# Altium PCB 4501-WB_AV_BMS_REV_A1.PcbDoc (part 2 of 2)
Units mil, origin at the board's own origin, x right, y up, seen from the top; angles counter-clockwise.
Board outline 3758.45 x 2809.6 mil, 2 copper layers (Top Layer, Bottom Layer), stack 65.792 mil thick; 104 components, 87 nets, 330 pads, 249 vias.
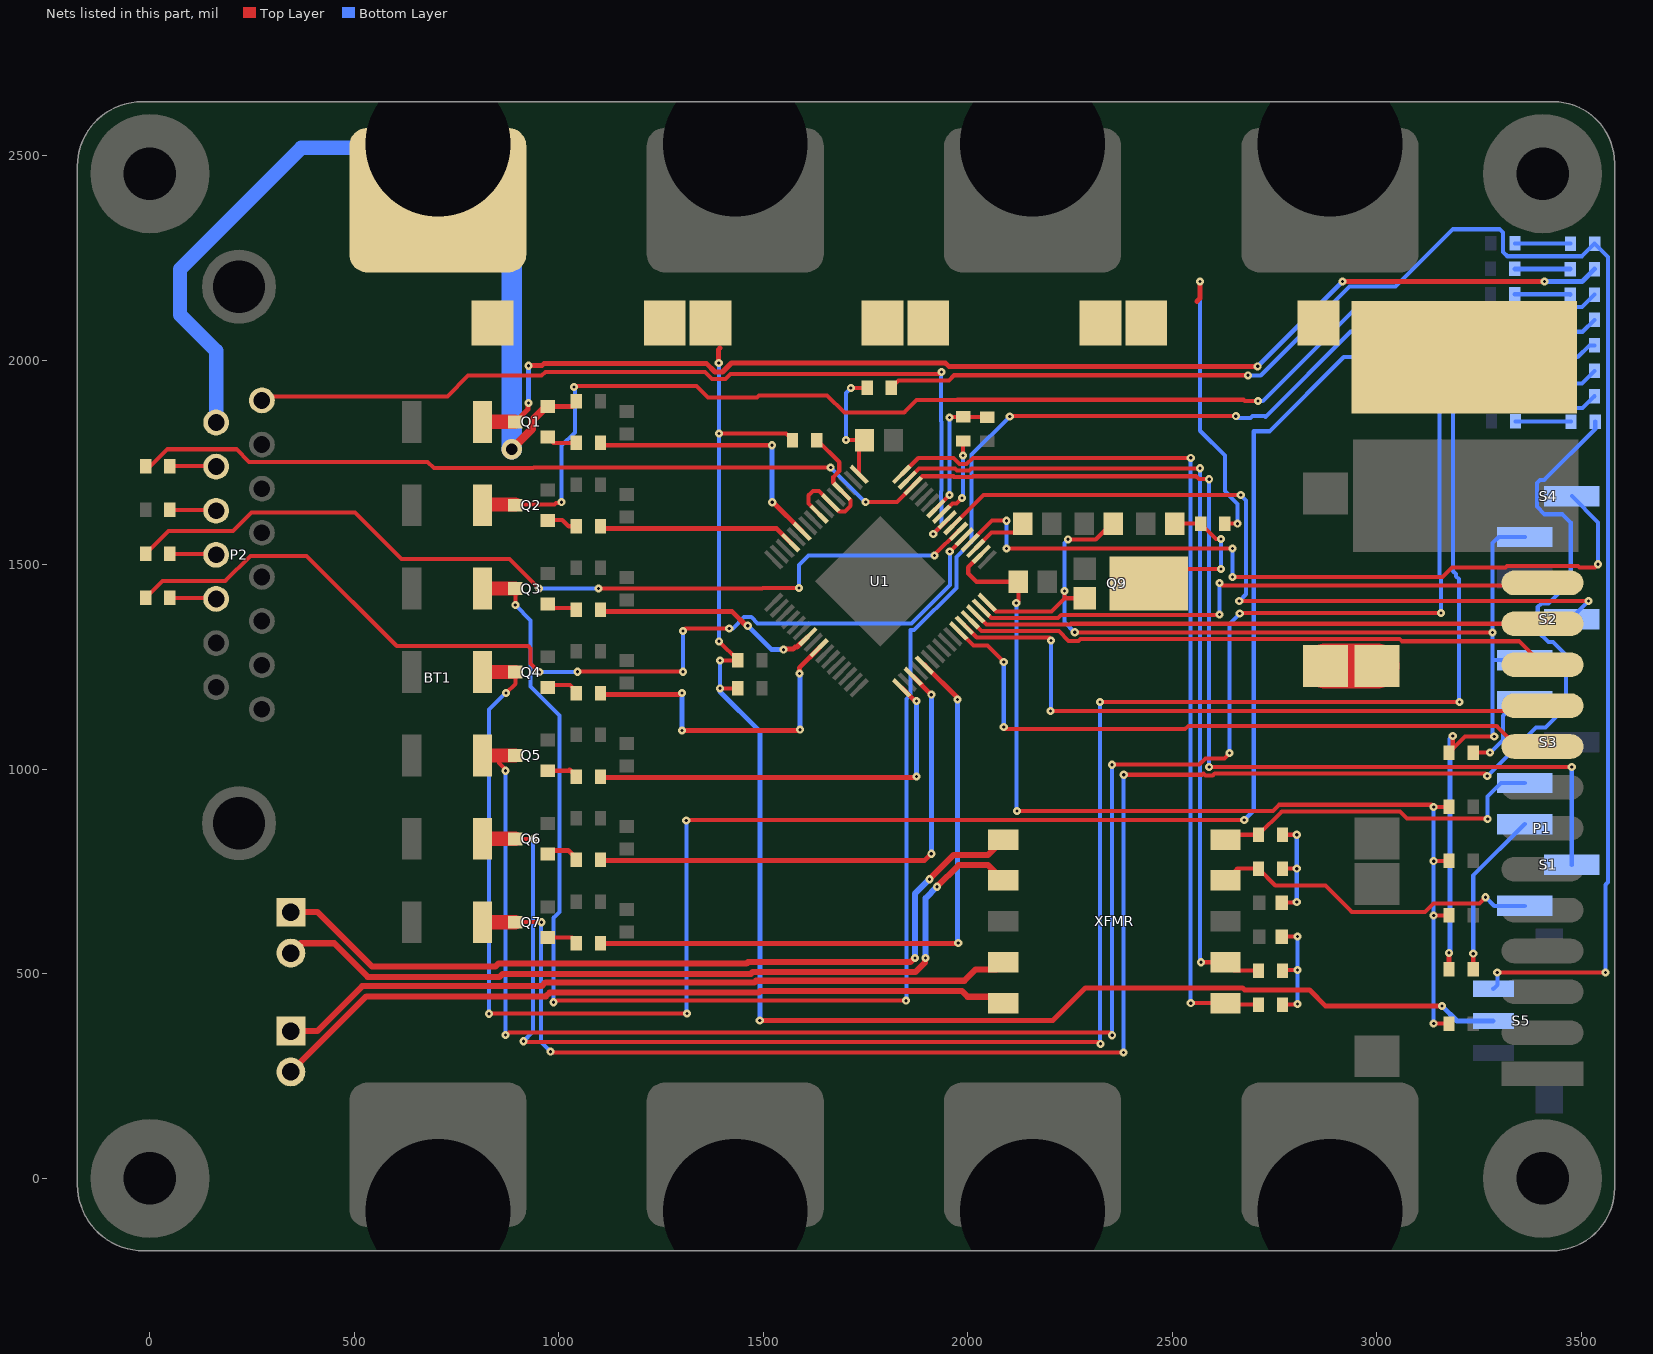
[diagram p2: the nets of this part, all layers, seen from the top]

## Via types
v1: diameter 19.87, hole 7.87, Top Layer to Bottom Layer, tented both sides, 230 vias
v2: diameter 50, hole 28, Top Layer to Bottom Layer, tented both sides, 10 vias
v3: diameter 19.87, hole 7.87, Top Layer to Bottom Layer, 9 vias

## Nets (pads, with @x,y where several pads share a name; then routed paths per layer and width w, separated by ;. In a path a pad name is that pad's centre, name@x,y a point inside that pad or via, vN(x,y) a via of type N, cw(c..) or ccw(c..) an arc to the next point about the centre after c; other vN are vias at no path point) (continued)
GPIO5: P1.9 U1.43 | length 1644.2
  Top Layer w10: U1.43@1977.49,1338.54 2013.5,1302.53 2047.7,1302.53 v1(2087.9,1262.33) ; v1(2087.9,1103.43) 2092.84,1098.5 2531.37,1098.5 2539.25,1106.37 3293.16,1106.37 3343.63,1055.91 P1.9@3405.05,1055.91
  Bottom Layer w10: v1(2087.9,1103.43) v1(2087.9,1262.33)
GPIO6: P1.10 U1.44 | length 1603.4
  Top Layer w10: U1.44@1991.41,1352.46 2021.77,1322.1 2199.82,1322.1 2203.5,1318.42 v1(2203.5,1314.93) ; v1(2202.23,1142.51) P1.10@3402.95,1142.51
  Bottom Layer w10: v1(2202.23,1142.51) 2203.5,1143.78 v1(2203.5,1314.93)
GPIO7: P1.11 U1.45 | length 1449.6
  Top Layer w10: U1.45@2005.33,1366.38 2033.61,1338.1 2222.45,1338.1 2246.35,1314.2 2270.07,1314.2 2275.01,1319.13 3055.86,1319.13 3061.66,1313.33 3347.63,1313.33 P1.11@3405.05,1255.91
GPIO8: P1.12 U1.46 | length 1397.5
  Top Layer w10: U1.46@2019.25,1380.3 2045.45,1354.1 2250.75,1354.1 2252.73,1356.07 3404.89,1356.07 P1.12@3405.05,1355.91
GPIO9: P1.13 U1.47 | length 1468.2
  Top Layer w10: U1.47@2033.17,1394.22 2057.29,1370.1 2220.91,1370.1 2228.31,1377.49 2614.12,1377.49 v1(2615.43,1378.81) ; v1(2615.43,1455.91) 2622.24,1449.1 3398.25,1449.1 P1.13@3405.05,1455.91
  Bottom Layer w10: v1(2615.43,1378.81) v1(2615.43,1455.91)
IA_N: P4.1 XFMR.4 | length 1812.1
  Top Layer w15: P4.1@344.63,360.13 409.28,360.13 519.08,469.93 957.87,469.93 966.94,479 1477.93,479 1482.06,483.13 1991.55,483.13 2019.26,510.83 2069.6,510.83 XFMR.4@2087.1,528.33
IA_P: P4.2 XFMR.5 | length 1836.8
  Top Layer w15: P4.2@344.63,260.13 529.43,444.93 968.23,444.93 977.29,454 1488.28,454 1492.41,458.13 1984.96,458.13 1999.19,443.9 2071.54,443.9 XFMR.5@2087.1,428.33
IB_N: P3.2 XFMR.2 | length 2006.5
  Top Layer w15: P3.2@344.63,550.83 368.56,574.76 450.72,574.76 532.8,492.68 855.28,492.68 862.6,500 1469.23,500 1473.36,504.13 1871.58,504.13 1895.63,528.18 1895.63,537.66 v1(1896.5,538.53) ; v1(1924.4,713.03) 1977.2,765.83 2049.6,765.83 XFMR.2@2087.1,728.33
  Bottom Layer w15: v1(1896.5,538.53) 1896.5,685.13 v1(1924.4,713.03)
IB_P: P3.1 XFMR.1 | length 2018.5
  Top Layer w15: P3.1@344.63,650.83 410,650.83 543.16,517.68 844.92,517.68 852.24,525 1458.87,525 1463,529.13 1859.9,529.13 1869.31,538.53 v1(1870.63,538.53) ; v1(1906.1,731.33) 1965.61,790.83 2049.6,790.83 XFMR.1@2087.1,828.33
  Bottom Layer w15: v1(1870.63,538.53) 1870.63,695.85 v1(1906.1,731.33)
NetC9_2: C9.2 R22.1 U1.1 | length 306.7
  Top Layer w10: v1(1701.9,1805.23) 1746.57,1805.23 C9.2@1747.47,1804.33 1733.9,1790.77 U1.1@1733.9,1721.32 ; v1(1713.9,1932.23) 1714.6,1932.93 R22.1@1753.77,1932.93
  Bottom Layer w10: v1(1701.9,1805.23) 1701.9,1920.23 v1(1713.9,1932.23)
NetC10_2: C10.2 Q9.3 R25.1 | length 395.2
  Top Layer w10: Q9.3@2442.6,1454.63 2478.1,1490.13 v1(2619.3,1490.13) ; C10.2@2505.65,1600.83 R25.1@2569.3,1600.83 2606.9,1563.23 v1(2619.3,1563.23)
  Bottom Layer w10: v1@2619.3,1488.63 v1(2619.3,1490.13) v1(2619.3,1563.23)
NetC14_2: C14.2 R32.2 R33.1 | length 280.4
  Top Layer w10: R33.1@2767.51,510.01 2768.34,509.18 v1(2806.35,509.18) ; C14.2@2767.51,591.08 v1(2806.35,591.08) ; R32.2@2769.48,425 2805.37,425 v1(2806.35,425.99)
  Bottom Layer w10: v1(2806.35,425.99) v1(2806.35,509.18) v1(2806.35,591.08)
NetC15_2: C15.2 R34.2 R35.1 | length 275.7
  Top Layer w10: C15.2@2769.48,676.09 C15.2@2767.51,674.12 2804.09,674.12 2805.1,675.13 v1(2804.23,676) ; R34.2@2769.51,757.19 v1(2804.23,757.19) ; R35.1@2769.48,840.2 v1(2804.23,840.2)
  Bottom Layer w10: v1(2804.23,676) v1(2804.23,757.19) v1(2804.23,840.2)
NetD2_1: D2.1 Q1.3 R3.1 | length 2961.8
  Top Layer w12: R3.1@813.17,1849.7 R3.1@814.71,1848.16 ; Q1.3@892.11,1849.7 894.08,1849.7 924.31,1879.93 924.31,1894.43 v1(925.82,1895.94) ; v1(925.82,1987.03) 958.39,1987.03 964.12,1992.77 1360.68,1992.77 1381.71,1971.73 1400.22,1971.73 1422.16,1993.67 1944.99,1993.67 1953.22,1985.43 v1(2708.6,1985.43) ; v1(2915.9,2192.73) v1(3409.7,2192.73)
  Top Layer w35: R3.1@813.17,1849.7 Q1.3@892.11,1849.7
  Bottom Layer w12: v1(925.82,1895.94) v1(925.82,1987.03) ; v1(2708.6,1985.43) v1(2915.9,2192.73) ; v1(3409.7,2192.73) 3501.58,2192.73 D2.1@3532.03,2223.18
NetD2_2: D2.2 R40.2 | length 136
  Bottom Layer w12: R40.2@3337.23,2223.88 3472.27,2223.88 D2.2@3472.97,2223.18
NetD3_1: D3.1 Q2.3 R6.1 | length 3141.9
  Top Layer w10: R6.1@813.17,1645.8 R6.1@814.97,1647.61 ; Q2.3@893.58,1647.61 989.6,1647.61 993.46,1651.46 1004.61,1651.46 v3(1006.5,1653.35) ; v1(1037.3,1934.95) 1039.62,1937.27 1336.14,1937.27 1364.32,1909.1 1483.97,1909.1 1489.51,1914.63 1655.5,1914.63 1697.92,1872.22 1844.42,1872.22 1874.94,1902.74 1973.5,1902.74 1974.63,1903.87 2673.85,1903.87 2677.1,1900.62 2709.41,1900.62 v1(2709.5,1900.53)
  Top Layer w35: R6.1@814.97,1647.61 Q2.3@893.58,1647.61
  Bottom Layer w10: v3(1006.5,1653.35) 1006.5,1791.43 1039.1,1824.03 1039.1,1933.15 v1(1037.3,1934.95) ; v1(2709.5,1900.53) 2721.19,1900.53 2951.09,2130.43 3501.44,2130.43 D3.1@3532.03,2161.02
NetD3_2: D3.2 R45.2 | length 136
  Bottom Layer w12: R45.2@3337.23,2161.72 3472.27,2161.72 D3.2@3472.97,2161.02
NetD4_1: D4.1 Q3.3 R9.1 | length 5083.2
  Top Layer w10: v3(893.58,1401.85) Q3.3@893.58,1445.51 ; v1(987,430.56) 989.67,430.56 993.54,434.43 v1(1848.7,434.43) ; v1(2102.6,1863.03) 2103.34,1863.77 2655.06,1863.77 v1(2655.24,1863.6)
  Top Layer w35: R9.1@813.17,1441.9 818.96,1441.9 819.29,1442.23 893.25,1442.23 Q3.3@893.58,1441.9
  Bottom Layer w10: v3(893.58,1401.85) 931,1364.43 931,1202.43 1001.51,1131.92 1001.51,651.65 987,637.13 v1(987,430.56) ; v1(1848.7,434.43) 1849.69,433.45 1849.69,1172.53 1859.66,1182.51 1859.66,1340.4 1868.39,1340.4 1971.9,1443.91 1971.9,1519.09 2009.44,1556.63 2009.44,1769.87 v1(2102.6,1863.03) ; v1(2655.24,1863.6) 2660.14,1858.7 2691.57,1858.7 2696.47,1863.6 2726.31,1863.6 2727.91,1862 2935.95,2070.03 3503.2,2070.03 D4.1@3532.03,2098.86
NetD4_2: D4.2 R46.2 | length 136
  Bottom Layer w10: R46.2@3337.23,2099.56 3472.27,2099.56 D4.2@3472.97,2098.86
NetD5_1: D5.1 R22.2 S5.3 | length 4054.4
  Top Layer w10: R22.2@1812.83,1932.93 1830.63,1950.74 1953.62,1950.74 1966.55,1963.67 2684.86,1963.67 v1(2685.1,1963.43) ; v1(3294.59,503.24) v1(3558.91,503.24)
  Bottom Layer w10: v1(2685.1,1963.43) 2716.21,1963.43 2933.61,2180.83 3046,2180.83 3185.9,2320.73 3299.8,2320.73 3308.3,2312.23 3308.3,2265.33 3318.9,2254.73 3502.13,2254.73 D5.1@3532.73,2285.33 3565.1,2252.96 3565.1,724.07 3558.91,717.88 v1(3558.91,503.24) ; S5.3@3284.79,463.49 3294.59,473.29 v1(3294.59,503.24)
NetD5_2: D5.2 R23.1 | length 136
  Bottom Layer w10: R23.1@3337.93,2286.03 3338.63,2285.33 D5.2@3473.67,2285.33
NetD6_1: D6.1 Q4.3 R12.1 | length 5150.5
  Top Layer w10: v1(829.3,402.43) 829.8,402.93 v1(1313,402.93) ; v3(870.8,1186.49) 893.58,1209.28 Q4.3@893.58,1243.42 ; v1(1311.6,875.13) 1312.4,875.93 v1(2675.9,875.93)
  Top Layer w35: R12.1@813.17,1238 Q4.3@893.58,1238
  Bottom Layer w10: v1(829.3,402.43) 829.3,1146.59 869.2,1186.49 v3(870.8,1186.49) ; v1(1311.6,875.13) 1311.6,404.33 v1(1313,402.93) ; v1(2675.9,875.93) 2699.1,899.13 2699.1,1826.66 2737.83,1826.66 2919.16,2007.99 3491.31,2007.99 3520.02,2036.71 D6.1@3532.03,2036.71
NetD6_2: D6.2 R48.2 | length 136
  Bottom Layer w10: R48.2@3337.23,2037.41 3472.27,2037.41 D6.2@3472.97,2036.71
NetD7_1: D7.1 Q5.3 R15.1 | length 5023.3
  Top Layer w10: 853.38,1034.1 853.38,1015.2 869.2,999.37 v3(869.2,996.7) ; v1(869.2,350.33) 870.8,348.73 878.17,356.11 2346.53,356.11 v1(2352.9,349.73) ; v1(2352.6,1011.43) 2565.79,1011.43 2581.39,1027.03 2627.2,1027.03 v1(2640,1039.83) ; v1(2665,1380.93) 2666.1,1382.03 v1(3156.8,1382.03)
  Top Layer w12: Q5.3@892.13,1025.4 Q5.3@900.83,1034.1
  Top Layer w35: R15.1@813.17,1034.1 853.38,1034.1 Q5.3@893.58,1034.1
  Top Layer w35.63: R15.1@813.17,1029.7 R15.1@818.98,1023.89
  Bottom Layer w10: v1(869.2,350.33) v3(869.2,996.7) ; v1(2352.6,1011.43) 2352.6,353.23 2349.1,349.73 v1(2352.9,349.73) ; v1(2640,1039.83) 2639.6,1040.23 2639.6,1355.53 v1(2665,1380.93) ; v1(3156.8,1382.03) 3156.46,1382.03 3156.46,1469.34 3153.7,1472.11 3153.7,1905.43 3192.1,1943.83 3501.31,1943.83 D7.1@3532.03,1974.55
NetD7_2: D7.2 R49.2 | length 136
  Bottom Layer w10: R49.2@3337.23,1975.25 3472.27,1975.25 D7.2@3472.97,1974.55
NetD8_1: D8.1 Q6.3 R18.1 | length 4836.4
  Top Layer w10: Q6.3@893.58,830.2 v1(938.61,830.2) ; v1(913.2,335.17) 914.6,333.77 2319.46,333.77 v1(2324.4,328.83) ; v1(2323,1164.43) 2322.9,1164.53 v1(3201.9,1164.53)
  Top Layer w35: R18.1@813.17,830.2 Q6.3@893.58,830.2
  Bottom Layer w10: v1(913.2,335.17) 936.93,358.91 936.93,828.53 v1(938.61,830.2) ; v1(2323,1164.43) 2323,330.23 v1(2324.4,328.83) ; v1(3201.9,1164.53) 3200.6,1165.83 3200.6,1465.23 3193.74,1472.1 3193.74,1477.33 3186.6,1484.46 3186.6,1871.53 3199.44,1884.38 3453.94,1884.38 3454.64,1883.68 3503.31,1883.68 D8.1@3532.03,1912.39
NetD8_2: D8.2 R50.2 | length 136
  Bottom Layer w10: R50.2@3337.23,1913.09 3472.27,1913.09 D8.2@3472.97,1912.39
NetD9_1: D9.1 Q7.3 R21.1 | length 4644.6
  Top Layer w10: Q7.3@893.58,626.3 v3(957.87,626.3) ; v1(979.8,309.73) 981.5,308.03 2315.59,308.03 2315.73,307.9 2380.46,307.9 v1(2380.6,308.03) ; v1(2381.1,986.73) 2573.09,986.73 2576.45,990.09 2581.39,985.16 2598.73,985.16 2603.67,990.09 3264.04,990.09 v1(3270.1,984.03)
  Top Layer w12: R21.1@813.17,626.3 813.17,633.21 R21.1@830.79,650.83
  Top Layer w35: R21.1@813.17,626.3 Q7.3@893.58,626.3
  Bottom Layer w10: v3(957.87,626.3) 956.3,624.73 956.3,333.23 v1(979.8,309.73) ; v1(2380.6,308.03) 2381.1,308.53 v1(2381.1,986.73) ; v1(3270.1,984.03) 3272,985.93 3272.92,985.93 3389.62,1102.63 3412.9,1102.63 3462.8,1152.53 3462.8,1279.23 3430.5,1311.53 3419.5,1311.53 3393.4,1337.63 3393.4,1396.53 3402.8,1405.93 3419.8,1405.93 3474.1,1460.23 3474.1,1603.13 3453.5,1623.73 3410.1,1623.73 3391.5,1642.33 3391.5,1700.03 3398.9,1707.43 3409.3,1707.43 3534.13,1832.26 D9.1@3534.13,1850.23
NetD9_2: D9.2 R51.2 | length 136
  Bottom Layer w10: R51.2@3339.33,1850.93 3474.37,1850.93 D9.2@3475.07,1850.23
NetP2_10: P2.10 R38.2 | length 113.9
  Top Layer w10: R38.2@48.73,1741.73 160.55,1741.73 P2.10@161.99,1740.29
NetP2_11: P2.11 R39.2 | length 114
  Top Layer w10: R39.2@48.73,1634.27 160.14,1634.27 P2.11@161.99,1632.41
NetP2_12: P2.12 R37.1 | length 114.2
  Top Layer w10: R37.1@48.73,1526.8 159.73,1526.8 P2.12@161.99,1524.54
NetP2_13: P2.13 R36.1 | length 114.4
  Top Layer w10: R36.1@48.73,1419.33 159.33,1419.33 P2.13@161.99,1416.67
NetP5_1: P5.1 P9.2 | length 125.7
  Top Layer w10: P9.2@3000,1253.13 P9.2@3000.5,1252.63
  Top Layer w110: P5.1@2875,1253.13 P9.2@3000,1253.13
NetQ1_2: Q1.1 R2.1 | length 77.5
  Top Layer w10: Q1.1@970.85,1812.3 972.82,1812.3 986.71,1798.42 R2.1@1042.57,1798.42
NetQ2_2: Q2.1 R5.1 | length 76.8
  Top Layer w10: Q2.1@972.32,1610.21 1008.29,1610.21 1024.06,1594.44 R5.1@1042.57,1594.44
NetQ3_2: Q3.1 R8.1 | length 57.3
  Top Layer w10: 990.97,1394.71 1038.33,1394.71 R8.1@1042.57,1390.47
  Top Layer w12: R8.1@1042.57,1390.47 R8.1@1042.57,1394.4
NetQ4_2: Q4.1 R11.1 | length 80.6
  Top Layer w10: Q4.1@972.32,1206.02 1026.99,1206.02 1042.57,1190.43 R11.1@1042.57,1186.49
NetQ5_2: Q5.1 R14.1 | length 70.7
  Top Layer w12: Q5.1@979.57,996.7 1024.06,996.7 1026.22,998.87 R14.1@1042.57,982.52
NetQ6_2: Q6.1 R17.1 | length 80.3
  Top Layer w12: Q6.1@974.37,802.1 1022.95,802.1 1042.57,782.48 R17.1@1042.57,778.54
NetQ7_2: Q7.1 R20.1 | length 78.5
  Top Layer w10: Q7.1@972.32,588.9 1032.17,588.9 1042.57,578.5 R20.1@1042.57,574.57
NetR24_2: R24.2 U1.4 U1.6 U1.8 | length 397.8
  Top Layer w10: R24.2@1630.43,1805.13 1631.41,1805.13 1685.54,1751.01 1685.54,1729.19 1670.97,1714.62 1670.97,1700.74 U1.4@1692.14,1679.57 1713.32,1658.39 1713.32,1644.51 1699.36,1630.55 1685.48,1630.55 U1.6@1664.31,1651.73 1635.6,1680.43 1621,1680.43 1610.72,1670.15 1610.72,1649.63 U1.8@1636.47,1623.89
NetR28_1: R28.1 S1.1 | length 407.5
  Top Layer w10: R28.1@3235.73,511.05 v1(3235.73,549.36)
  Bottom Layer w10: v1(3235.73,549.36) 3235.73,740.36 S1.1@3361.7,866.33
NetR29_1: R29.1 S3.1 | length 212.6
  Top Layer w10: R29.1@3235.73,1041.13 v1(3276.88,1041.13)
  Bottom Layer w10: v1(3276.88,1041.13) 3277.51,1041.13 3308.4,1072.03 3308.4,1131.13 3343.9,1166.63 S3.1@3361.7,1166.63
NetR30_1: R30.1 U1.57 | length 206.9
  Top Layer w10: U1.57@1935.73,1623.89 1962.04,1650.2 1972.26,1650.2 v1(1985.8,1663.73) ; v1(1988.5,1767.73) R30.1@1988.5,1802.91
  Bottom Layer w10: v1(1985.8,1663.73) 1988.5,1666.43 v1(1988.5,1767.73)
NetR30_2: R30.2 R31.1 U1.58 | length 330.1
  Top Layer w10: U1.58@1921.81,1637.81 1955,1670.99 v1(1955,1671.13) ; v1(1954.9,1860.43) 1956.43,1861.96 R30.2@1988.5,1861.96 2046.82,1861.96 R31.1@2047.65,1861.13
  Bottom Layer w10: v1(1954.9,1860.43) 1954.9,1671.23 v1(1955,1671.13)
NetR32_1: R32.1 U1.64 XFMR.6 | length 2236
  Top Layer w10: U1.64@1838.3,1721.32 1878.71,1761.73 1964.89,1761.73 1979.83,1746.8 1997.17,1746.8 2012.11,1761.73 v1(2544.9,1761.73) ; v1(2544.9,428.33) XFMR.6@2630.01,428.33 2633.34,425 R32.1@2710.43,425
  Bottom Layer w10: v1(2544.9,428.33) v1(2544.9,1761.73)
NetR33_2: R33.2 U1.63 XFMR.7 | length 2089
  Top Layer w10: U1.63@1852.22,1707.4 1880.55,1735.73 1968.26,1735.73 1973.2,1730.8 2003.8,1730.8 2008.74,1735.73 2567.4,1735.73 v1(2567.8,1736.13) ; v1(2570.2,528.33) XFMR.7@2630.01,528.33 2650.3,508.04 R33.2@2710.43,508.04
  Bottom Layer w10: v1(2567.8,1736.13) 2567.8,530.73 v1(2570.2,528.33)
NetR34_1: R34.1 S1.3 XFMR.9 | length 810.9
  Top Layer w10: XFMR.9@2630.01,728.33 2658.84,757.16 R34.1@2710.43,757.16 2751.66,715.93 2874.5,715.93 2938.8,651.63 3118.19,651.63 3138.85,672.29 3250.86,672.29 v1(3266,687.43)
  Bottom Layer w10: v1(3266,687.43) 3287.1,666.33 S1.3@3361.7,666.33
NetR35_2: R35.2 S3.3 XFMR.10 | length 837.1
  Top Layer w10: XFMR.10@2630.01,828.33 2641.88,840.2 R35.2@2710.43,840.2 2767.6,897.37 3056.36,897.37 3073.83,879.9 3269.54,879.9 v1(3271,878.43)
  Bottom Layer w10: v1(3271,878.43) 3271,933.73 3303.9,966.63 S3.3@3361.7,966.63
NetS2_2: S2.2 U1.55 | length 1920.8
  Top Layer w10: U1.55@1963.57,1596.05 2038.16,1670.63 v1(2667.2,1670.63) ; v1(2663.7,1411.73) v1(3517.6,1411.73)
  Bottom Layer w10: v1(2663.7,1411.73) 2680.14,1428.17 2680.14,1657.7 v1(2667.2,1670.63) ; S2.2@3476.8,1367.33 3476.8,1370.93 v1(3517.6,1411.73)
NetS4_2: S4.2 U1.52 | length 1904.8
  Top Layer w10: U1.52@2005.33,1554.29 2059.07,1608.03 v1(2094.2,1608.03) ; v1(2094.6,1540.13) v1(2647.3,1540.13) ; v1(2647.3,1470.03) 3160.61,1470.03 3184.31,1493.73 3314.9,1493.73 3318.07,1496.91 3492.04,1496.91 3495.21,1493.73 3533.4,1493.73 v1(3541.1,1501.43)
  Bottom Layer w10: v1(2094.2,1608.03) 2094.6,1607.63 v1(2094.6,1540.13) ; v1(2647.3,1470.03) v1(2647.3,1540.13) ; S4.2@3476.8,1668.13 3541.1,1603.83 v1(3541.1,1501.43)
S1: R20.2 U1.37 | length 1591.3
  Top Layer w12: R20.2@1101.63,574.57 1101.63,574.43 1975.49,574.43 v1(1976.5,575.43) ; U1.37@1893.98,1255.02 1894.79,1255.02 1976.5,1173.31 1974.6,1171.41 v1(1974.6,1170.53)
  Bottom Layer w12: v1(1974.6,1170.53) 1974.6,577.33 v1(1976.5,575.43)
S2: R17.2 U1.35 | length 1268.9
  Top Layer w12: R17.2@1101.63,778.54 1101.63,777.43 1894.39,777.43 v1(1910.7,793.73) ; U1.35@1866.14,1227.18 v1(1910.7,1182.63)
  Bottom Layer w12: v1(1910.7,793.73) v1(1910.7,1182.63)
S3: R14.2 U1.33 | length 1009.5
  Top Layer w12: R14.2@1101.63,982.52 1101.63,980.43 1872.09,980.43 v1(1874.18,982.52) ; U1.33@1838.3,1199.35 1870.23,1167.42 v1(1874.18,1167.42)
  Bottom Layer w12: v1(1874.18,982.52) v1(1874.18,1167.42)
S6: R11.2 U1.25 | length 804.5
  Top Layer w12: R11.2@1101.63,1186.49 1101.63,1183.43 1297.98,1183.43 v1(1301.04,1186.49) ; v1(1301.04,1095.29) 1587.96,1095.29 1589.4,1096.73 v1(1589.4,1097.1) ; v1(1588.1,1234.53) 1588.1,1248.42 U1.25@1636.47,1296.78
  Bottom Layer w12: v1(1301.04,1095.29) v1(1301.04,1186.49) ; v1(1588.1,1234.53) 1589.4,1233.24 v1(1589.4,1097.1)
S7: R8.2 U1.23 | length 564.5
  Top Layer w12: R8.2@1101.63,1390.47 1101.63,1386.43 1423.11,1386.43 1460.1,1349.43 v1(1461.8,1351.13) ; v1(1549.5,1292.73) 1551.01,1294.24 1572.55,1294.24 1577.54,1299.23 1582.27,1299.23 1592.05,1309.01 1593.02,1309.01 U1.23@1608.63,1324.62
  Bottom Layer w12: v1(1461.8,1351.13) 1520.2,1292.73 v1(1549.5,1292.73)
S11: R5.2 U1.13 | length 484.8
  Top Layer w12: R5.2@1101.63,1594.44 1101.63,1589.43 1531.73,1589.43 U1.13@1566.87,1554.29
S12: R2.2 U1.11 | length 667.5
  Top Layer w12: R2.2@1101.63,1798.42 1101.63,1792.43 v1(1521.29,1792.43) ; v1(1521.69,1653.13) 1523.7,1653.13 U1.11@1594.71,1582.13
  Bottom Layer w12: v1(1521.29,1792.43) 1521.29,1653.53 v1(1521.69,1653.13)
SCK: R38.1 S1.2 U1.62 | length 4532.6
  Top Layer w10: R38.1@-10.33,1741.73 1.68,1741.73 42.72,1782.78 211.64,1782.78 242.79,1751.63 679,1751.63 694.22,1736.41 936.98,1736.41 938.61,1738.03 v1(1664.6,1738.03) ; v1(1750.1,1653.83) 1826.49,1653.83 U1.62@1866.14,1693.48 1889.4,1716.74 1964.63,1716.74 1966.57,1714.8 2010.43,1714.8 2012.37,1716.74 2557.58,1716.74 2564.83,1709.49 v1(2590.06,1709.49) ; v1(2590.06,1006.09) v1(3476.66,1006.09)
  Bottom Layer w10: v1(1664.6,1738.03) 1748.8,1653.83 v1(1750.1,1653.83) ; v1(2590.06,1006.09) v1(2590.06,1709.49) ; S1.2@3476.66,766.33 v1(3476.66,1006.09)
SDI: R36.2 U1.53 | length 2439.9
  Top Layer w10: R36.2@-10.33,1419.33 30.87,1460.53 184.2,1460.53 245.6,1521.93 383,1521.93 603.6,1301.33 925.14,1301.33 931,1295.48 931,1258.73 v1(952,1237.73) ; v1(1045.3,1238.83) v1(1303.5,1238.83) ; v1(1303.5,1338.63) 1309.1,1344.23 v1(1416.5,1344.23) ; v1(1955.9,1532.7) U1.53@1991.41,1568.21
  Bottom Layer w10: v1(952,1237.73) 1044.2,1237.73 v1(1045.3,1238.83) ; v1(1303.5,1238.83) v1(1303.5,1338.63) ; v1(1416.5,1344.23) 1425.29,1344.23 1453.13,1372.07 1470.47,1372.07 1486.15,1356.4 1861.76,1356.4 1955.9,1450.53 v1(1955.9,1532.7)
SDO: R37.2 U1.54 | length 2199.4
  Top Layer w10: R37.2@-10.33,1526.8 45.31,1582.43 202.8,1582.43 248.5,1628.13 501.5,1628.13 614.8,1514.83 879,1514.83 v1(951.6,1442.23) ; v1(1097,1442.03) 1497.4,1442.03 1498.6,1443.23 1587.2,1443.23 v1(1587.1,1443.33) ; v1(1918.6,1523.23) 1918.6,1525.01 1975.72,1582.13 U1.54@1977.49,1582.13
  Bottom Layer w10: v1(951.6,1442.23) 1096.8,1442.23 v1(1097,1442.03) ; v1(1587.1,1443.33) 1587.1,1500.03 1610.3,1523.23 v1(1918.6,1523.23)
VCC: BT1.1 J5.1 P2.9 P6.1 P6.2 P7.1 P7.2 P10.1 P10.2 P11.1 P11.2 Q1.2 R1.1 R24.1 R25.2 R26.1 R27.1 S5.2 | length 6876.9
  Top Layer w10: P7.2@1370.49,2091.53 P7.2@1391.4,2070.63 ; v1(1391.7,1313.03) 1437.64,1267.09 R26.1@1437.64,1266.33 v1(1394.2,1266.33) ; v1(1391.7,1821.53) 1554.97,1821.53 R24.1@1571.37,1805.13 ; v1(1394,1198.13) R27.1@1437.64,1198.13 ; R25.2@2628.36,1600.83 v1(2659.2,1600.83) ; J5.1@3213.9,2007.93 J5.1@3215,2009.03
  Top Layer w12: Q1.2@968.88,1887.11 970.85,1887.11 1033.21,1887.11 1042.57,1896.47 R1.1@1042.57,1900.4 ; v1(1390.79,1993.67) 1390.79,2027.22 1394,2030.43 ; P7.2@1390.79,2090.33 P7.2@1391.4,2089.73 ; v1(1491.3,386.23) 2208.3,386.23 2287.4,465.33 2672.19,465.33 2676.69,460.83 2835.3,460.83 2875,421.13 v1(3159.7,421.13) ; 2560.4,2144.5 2567.4,2151.5 v1(2567.4,2192.73)
  Top Layer w19.68: Q1.2@962.98,1881.2 964.45,1881.2 968.88,1885.63 Q1.2@968.88,1887.11
  Top Layer w20: v2(884.88,1783) 934.22,1832.34 934.22,1852.44 Q1.2@962.98,1881.2
  Bottom Layer w10: v1(1390.79,1993.67) 1391.7,1992.77 v1(1391.7,1821.53) v1(1391.7,1313.03) ; v1(1394,1198.13) 1394,1266.13 v1(1394.2,1266.33) ; v1(2567.4,2192.73) 2567.4,1827.93 2628.3,1767.03 2628.3,1680.73 2646.26,1662.77 2646.26,1661.96 2659.2,1649.03 v1(2659.2,1600.83)
  Bottom Layer w12: v1(1394,1198.13) 1394,1190.23 1491.3,1092.93 v1(1491.3,386.23) ; v1(3159.7,421.13) 3196.09,384.75 S5.2@3284.79,384.75
  Bottom Layer w35: P2.9@161.99,1848.16 161.99,2023.24 73.4,2111.83 73.4,2222.73 370.27,2519.6 BT1.1@704.05,2519.6
  Bottom Layer w50: BT1.1@704.05,2519.6 869.33,2519.6 884.88,2504.05 v2(884.88,1783)
VREF1: C12.2 U1.51 | length 140.1
  Top Layer w10: U1.51@2019.25,1540.37 2058.21,1579.33 2112.77,1579.33 C12.2@2134.27,1600.83
VREF2: C13.2 R41.1 R42.1 R43.1 R44.1 U1.50 | length 2464.7
  Top Layer w10: U1.50@2033.17,1526.45 2001,1494.28 2001,1478.43 2020.7,1458.73 C13.2@2123.47,1458.73 2123.47,1412 v1(2118.5,1407.03) ; v1(2120.5,898.23) 2745.83,898.23 2760.97,913.37 3133.66,913.37 v1(3139,908.03) 3176.09,908.03 R44.1@3176.67,908.61 ; v1(3139,378.53) R41.1@3176.67,378.53 ; v1(3139,642.83) 3175.93,642.83 R42.1@3176.67,643.57 ; v1(3139,775.53) 3139.56,776.09 R43.1@3176.67,776.09
  Bottom Layer w10: v1(2118.5,1407.03) 2118.5,898.23 v1(2120.5,898.23) ; v1(3139,378.53) 3138.76,378.77 3138.76,642.6 v1(3139,642.83) v1(3139,775.53) v1(3139,908.03)
VREG: C11.2 Q9.1 R28.2 R29.2 S2.3 S4.3 U1.48 | length 3039.7
  Top Layer w10: U1.48@2047.09,1408.14 2069.13,1386.1 2204.07,1386.1 2236.1,1418.13 2236.1,1418.41 ; v1(2236.1,1436.03) 2236.1,1418.41 ; v1(2244.6,1562.43) 2244.76,1562.28 2312.71,1562.28 2351.26,1600.83 C11.2@2355.39,1600.83 ; v1(2261.4,1335.13) 3282.78,1335.13 v1(3283.18,1334.73) ; Q9.1@2285.83,1418.41 2236.1,1418.41 ; R29.2@3176.67,1041.13 3185.6,1050.06 3215.97,1080.43 v1(3287.2,1080.43)
  Top Layer w12: R28.2@3176.67,511.05 v1(3176.7,551.43) ; R29.2@3185.6,1050.06 v1(3185.6,1081.63)
  Bottom Layer w10: v1(2244.6,1562.43) 2236.1,1553.93 v1(2236.1,1436.03) 2236.1,1360.43 v1(2261.4,1335.13) ; v1(3287.2,1080.43) 3283.18,1084.45 3283.18,1267.33 ; S2.3@3361.84,1267.33 3283.18,1267.33 ; S4.3@3361.84,1568.13 3298.16,1568.13 3283.18,1553.15 v1(3283.18,1334.73) 3283.18,1267.33
  Bottom Layer w12: v1(3176.7,551.43) 3178.54,553.27 3178.54,1074.57 v1(3185.6,1081.63)
WDT: P2.1 U1.56 | length 2167.4
  Top Layer w10: P2.1@273.81,1902.1 273.81,1911.88 727.55,1911.88 778.3,1962.63 958.03,1962.63 967.28,1971.89 1357.51,1971.89 1374.67,1954.73 1407.27,1954.73 1419.5,1966.97 1931.56,1966.97 1935.9,1971.31 v1(1935.9,1971.73) ; v1(1915.4,1575.63) 1949.65,1609.89 U1.56@1949.65,1609.97
  Bottom Layer w10: v1(1915.4,1575.63) 1935.9,1596.13 1935.9,1660.63 1934.06,1662.46 1934.06,1679.81 1935.9,1681.64 1935.9,1849.83 1933.96,1851.76 1933.96,1969.8 v1(1935.9,1971.73)
pads on no net: P2.14 P2.15 P2.16 P2.17 S5.1 S5.P$1 S5.P$2 U1.2 U1.3 U1.5 U1.7 U1.9 U1.14 U1.15 U1.17 U1.19 U1.21 U1.26 U1.27 U1.29 U1.31 XFMR.3 XFMR.8

## Polygon pours and split planes (outlines as drawn)
VCC on Top Layer "Top Layer-VCC" (solid, pour order 0): 341.2,2636.31 341.2,2143.83 ccw(c477.3,2143.83) 477.3,2007.73 2654.05,2007.73 cw(c2654.05,1849.48) 2765.95,1961.38 2850.44,1876.89 ccw(c2954.87,1981.32) 2954.87,1833.63 3581.3,1833.63 3581.3,2175.43 1205.9,2175.43 cw(c1205.9,2316.23) 1065.1,2316.23 1065.1,2632.9 665.22,2635.71
GND on Top Layer "Top Layer-GND" (solid, pour order 16): 3581.3,1833.63 2773.9,1833.63 ccw(c2773.9,1784.14) 2724.4,1784.13 2724.4,1537.93 ccw(c2753.9,1537.93) 2753.9,1508.43 3582.03,1508.43
GND on Top Layer "Top Layer-GND 1" (solid, pour order 14): 2596.6,-177.17 3176.5,-177.17 ccw(c3176.5,-129.87) 3223.8,-129.87 3223.8,310.24 ccw(c3179.98,310.24) 3179.97,354.06 2613.74,353.98 ccw(c2613.75,289.13) 2548.9,289.13 2548.9,-129.47 ccw(c2596.6,-129.47)
GND on Bottom Layer "Bottom Layer-GND" (solid, pour order 24): 3223.8,-123.27 3223.8,314.53 ccw(c3182.8,314.53) 3182.8,355.53 3146.2,355.53 cw(c3146.2,382.03) 3119.7,382.03 3119.7,1782.23 ccw(c3067.9,1782.23) 3067.9,1834.03 2782.9,1834.03 ccw(c2782.9,1774.74) 2723.6,1774.73 2723.6,1536.63 ccw(c2751.2,1536.63) 2751.2,1509.03 2785.1,1509.03 cw(c2785.1,1462.64) 2831.5,1462.63 2831.34,407.27 cw(c2779.6,407.28) 2779.6,355.53 2613.9,355.53 ccw(c2613.9,290.54) 2548.9,290.53 2548.9,-123.27 ccw(c2602.8,-123.27) 2602.8,-177.17 3169.9,-177.17 ccw(c3169.9,-123.27)

## Keep-outs
Keep-Out Layer:
  lines w1: -177.65,2474.59 cw(c-19.3,2474.59) -19.31,2632.94 ; -177.65,2474.59 -177.65,2474.59 ; -177.65,2474.59 -177.65,-15.22 ccw(c-15.2,-15.22) -15.2,-177.67 ; -19.3,2631.93 ccw(c-19.3,2632.43) -19.29,2631.93 ; -19.3,2631.93 ccw(c-19.3,2474.59) -176.65,2474.59 -176.65,-15.22 ccw(c-15.2,-15.22) -15.2,-176.66 ; -19.29,2631.93 3431.29,2631.93 ; -19.3,2631.93 -19.29,2631.93 ; -19.3,2632.94 ccw(c-19.3,2632.43) -19.31,2632.94 ; -19.3,2632.94 ccw(c-19.3,2474.59) -19.31,2632.94 ; -19.3,2632.94 3431.3,2632.94 ; -15.2,-177.67 3427.8,-177.67 ccw(c3427.8,-23.67) 3581.8,-23.68 ; -15.2,-177.67 -15.2,-177.67 ; -15.2,-176.66 3427.8,-176.66 ccw(c3427.8,-23.67) 3580.8,-23.67 ; -15.2,-176.66 -15.2,-176.66 ; 3431.29,2631.93 ccw(c3431.3,2632.43) 3431.3,2631.93 ; 3431.3,2631.93 cw(c3431.3,2482.43) 3580.8,2482.43 ; 3431.29,2631.93 3431.3,2631.93 ; 3431.31,2632.94 ccw(c3431.3,2482.43) 3431.3,2632.94 ; 3431.31,2632.94 cw(c3431.3,2482.43) 3581.8,2482.44 ; 3431.31,2632.94 ccw(c3431.3,2632.43) 3431.3,2632.94 ; 3580.8,-23.65 ccw(c3581.3,-23.67) 3580.8,-23.67 ; 3580.8,-23.65 3580.8,2482.42 ; 3580.8,-23.67 3580.8,-23.65 ; 3580.8,2482.42 cw(c3581.3,2482.43) 3580.8,2482.43 ; 3580.8,2482.42 3580.8,2482.43 ; 3581.8,-23.68 ccw(c3581.3,-23.67) 3581.8,-23.67 ; 3581.8,-23.68 ccw(c3427.8,-23.67) 3581.8,-23.67 ; 3581.8,-23.67 ccw(c3581.3,-23.67) 3581.8,-23.67 ; 3581.8,-23.67 3581.8,2482.43 ; 3581.8,2482.43 ccw(c3581.3,2482.43) 3581.8,2482.44 ; 3581.8,2482.43 ccw(c3431.3,2482.43) 3581.8,2482.44

## Silkscreen, mask and mechanical layers (free items; w line width, h text height)
Top Overlay:
  drawing of 58 lines, arcs and shapes, not listed
  text "B3" at 2113.6,2132.03 h70
  text "B1" at 2681.2,2123.13 h70
  text "B5" at 1495.5,2122.03 h70
  text "B+" at 654.8,2120.33 h70
  text "P+" at 2811.7,1906.23 h70 r90
  text "P-" at 2807.9,1578.13 h70 r90
  text "4501-WB-AV-BMS / REV. A / NOV. 2019 / Pablo F." at 2456.2,526.1 h25
  text "B2" at 2120.5,254.33 h70
  text "B4" at 1399.4,252.43 h70
  text "B-" at 2755.6,250.63 h70
  text "B6" at 669.9,248.83 h70
Bottom Overlay:
  text "B+" at 1064.9,2538.43 h70
  text "B5" at 1806.7,2538.43 h70
  text "B3" at 2532.1,2530.73 h70
  text "B1" at 3226.2,2519.93 h70
  text "On" at 3423.2,2272.04 h25
  text "B7" at 3423.2,2209.88 h25
  text "B6" at 3423.2,2147.72 h25
  text "B5" at 3423.2,2085.57 h25
  text "B4" at 3423.2,2023.41 h25
  text "B3" at 3423.2,1961.25 h25
  text "B2" at 3423.2,1899.1 h25
  text "B1" at 3423.2,1836.94 h25
  text "B-" at 3217.4,-79.87 h70 r180
  text "B6" at 1077.1,-133.07 h70
  text "B4" at 1800,-138.77 h70
  text "B2" at 2524.8,-146.87 h70

## Text inside footprints (layer, text, board x,y; h text height)
U1: Top Overlay "*" at 1664.2,1753.73 h50 r315; Mechanical 13 "*" at 1742.35,1691.44 h50 r315